# Altium PCB Motor_Driver_HIP4082_Board_V1.1.PcbDoc
Units mil, origin at the board's own origin, x right, y up, seen from the top; angles counter-clockwise.
Board outline 3070.87 x 1653.54 mil, 4 copper layers (TOP, GND02, POWER03, Bottom), stack 23.756 mil thick; 59 components, 43 nets, 180 pads, 243 vias.
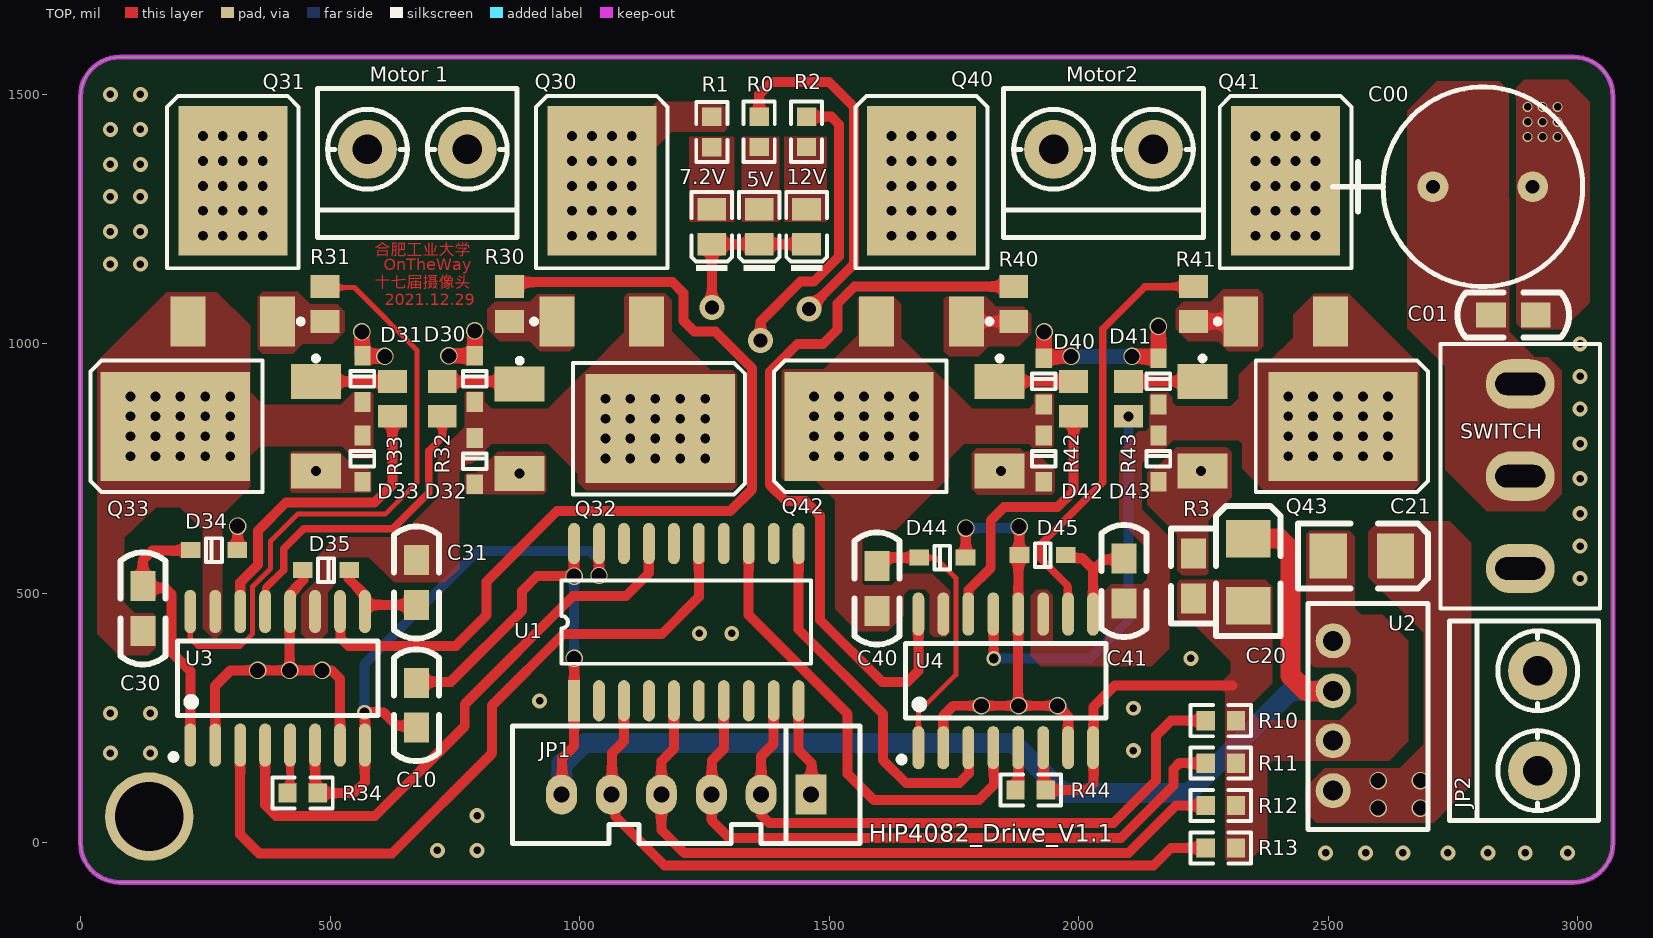
[diagram p0: TOP view]
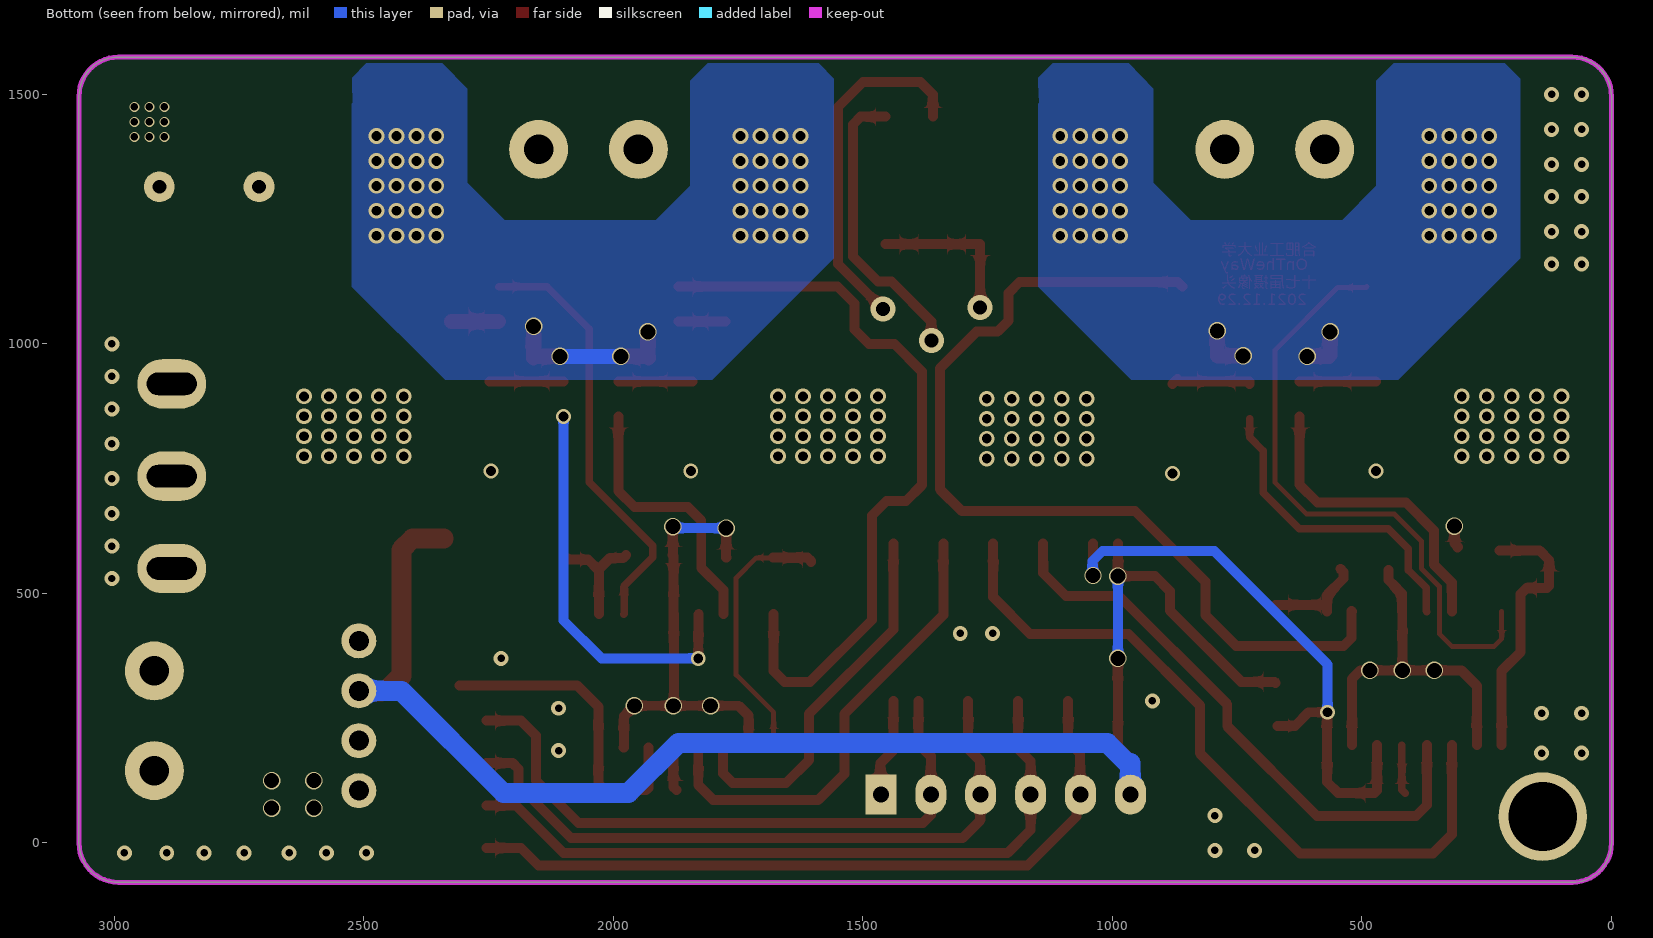
[diagram p1: Bottom view, seen from below]
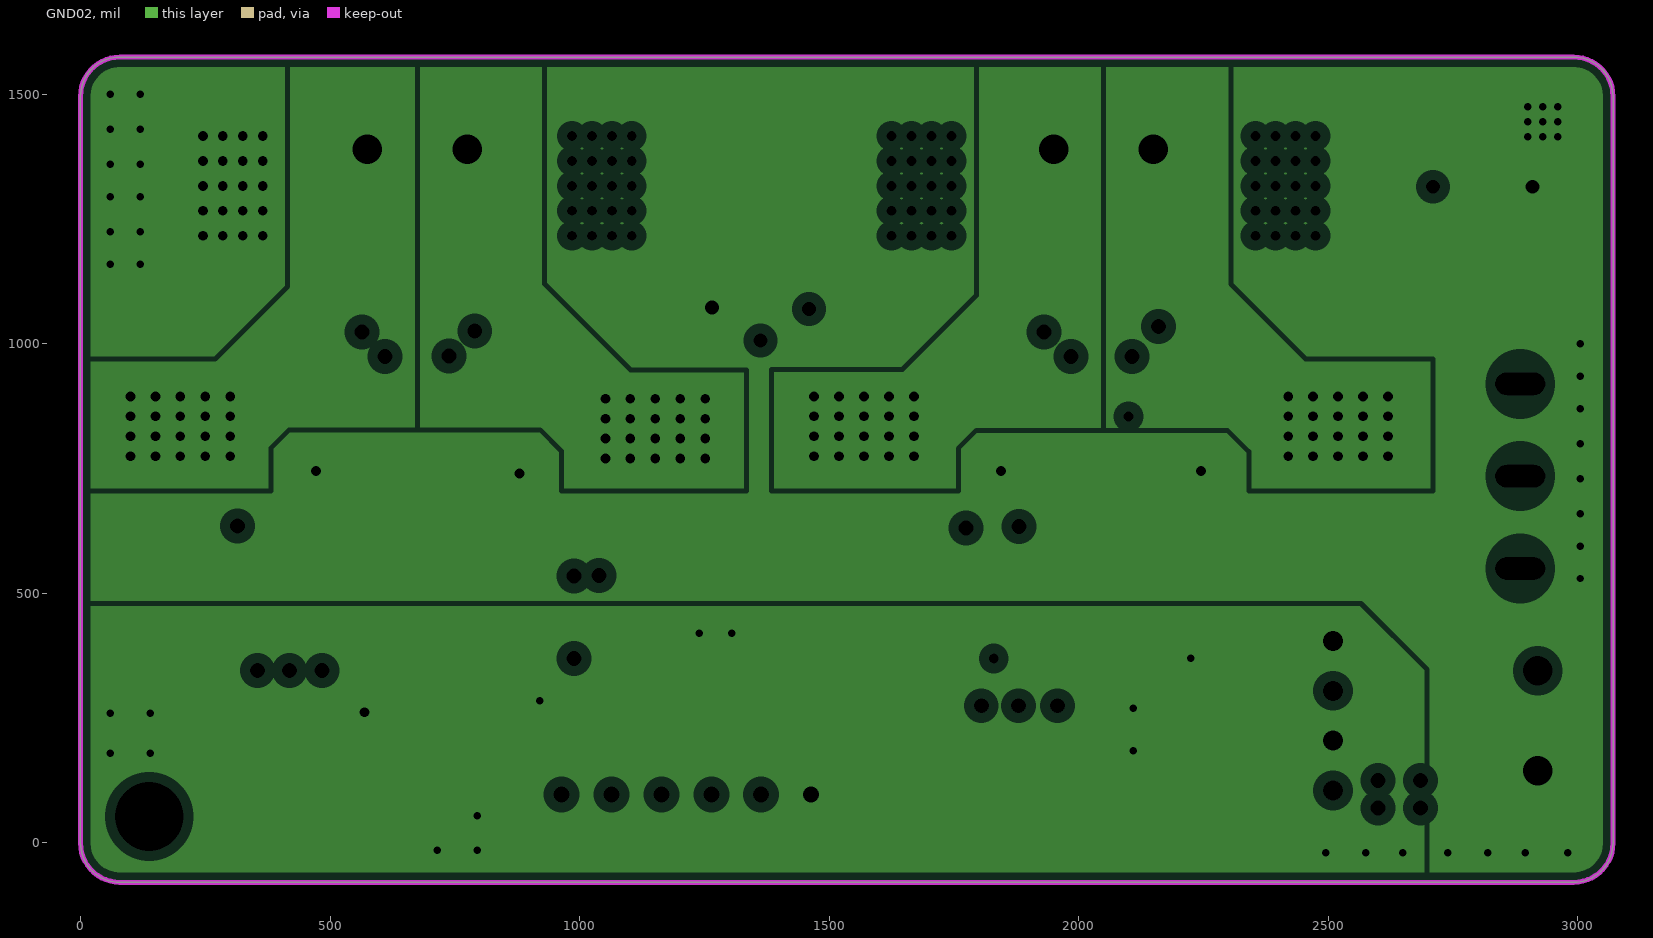
[diagram p2: GND02, clearances drawn from the general rule]
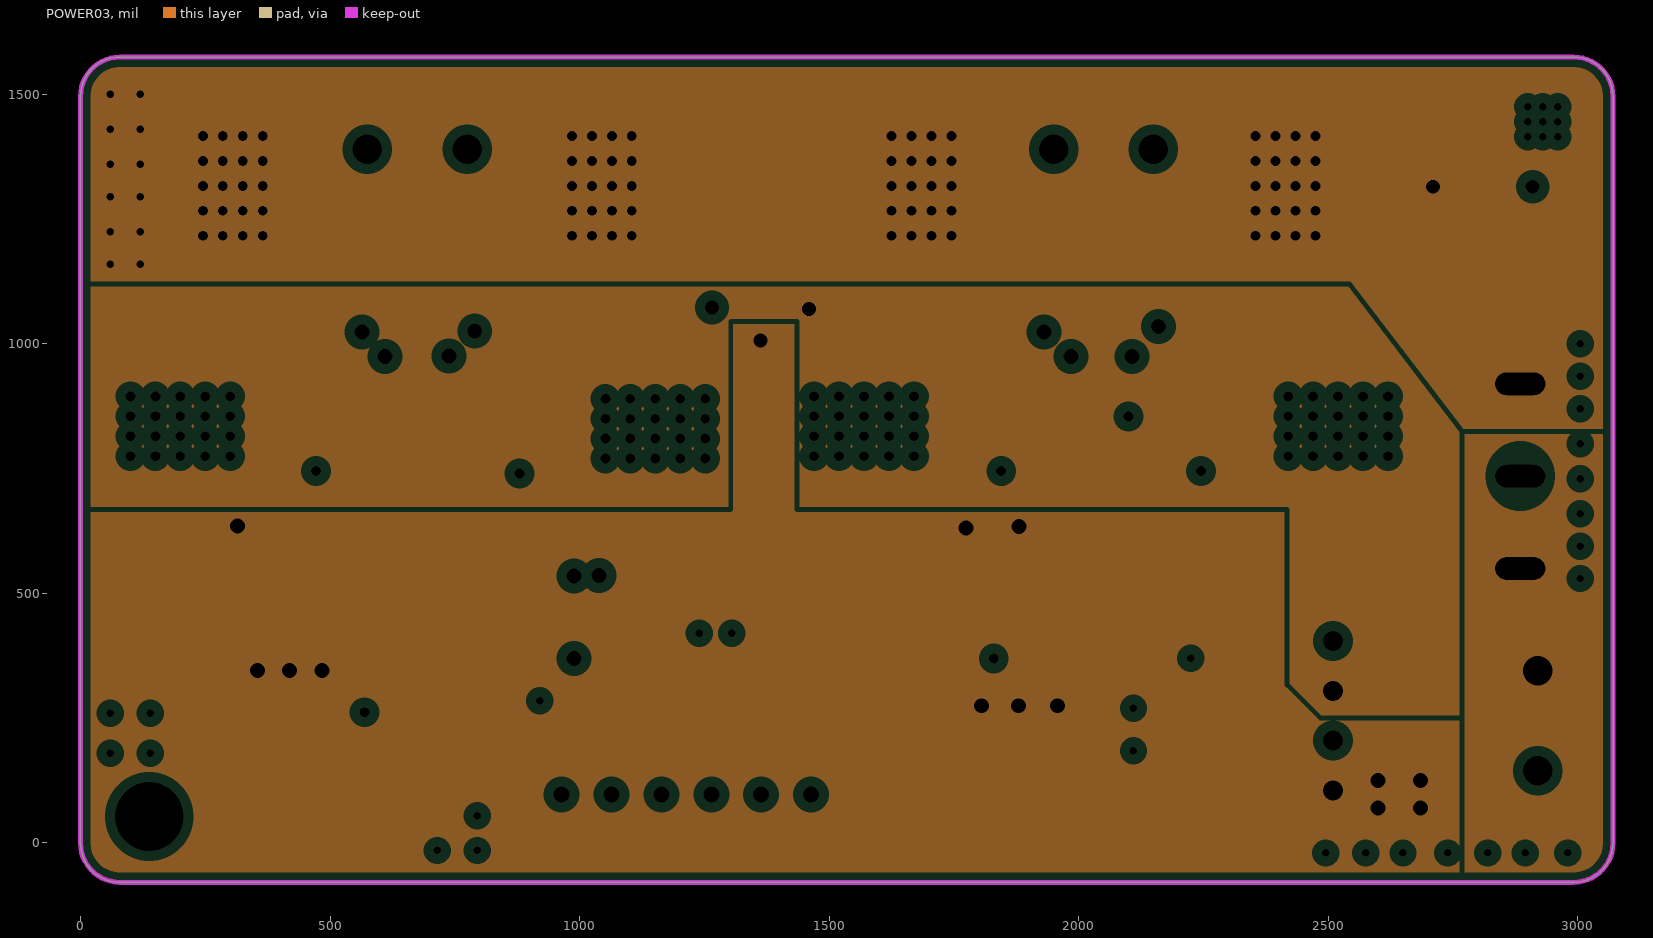
[diagram p3: POWER03, clearances drawn from the general rule]
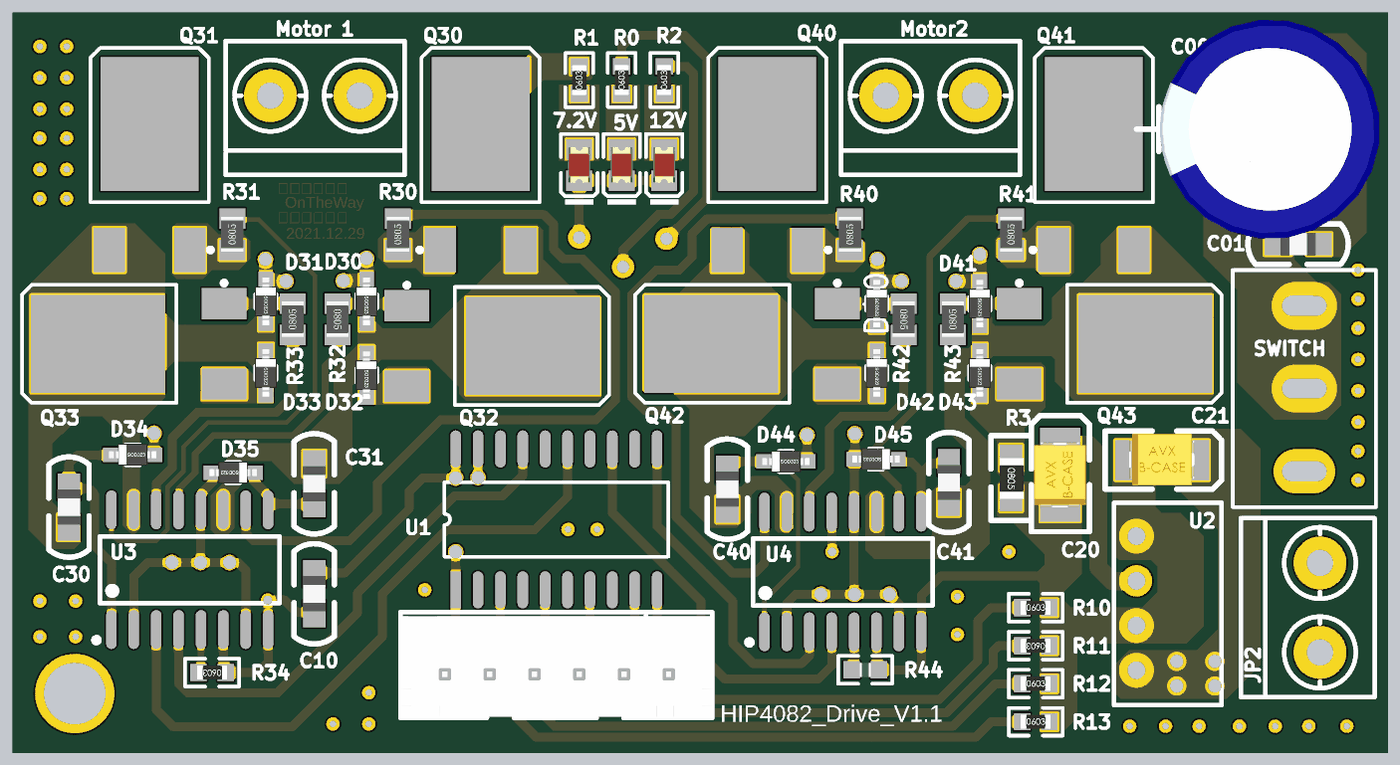
[diagram p4: 3D render of the assembled board from above, using the file's embedded part models]

## Layer stack, top to bottom
Top Solder: solder mask 0.4, Solder Resist, Dk 3.5
TOP: signal copper 1.4
Dielectric 2: prepreg 2.8, PP-006, Dk 4.1
GND02: plane copper 1.378, net (Multiple Nets)
Dielectric 1: dielectric 12.6, FR-4, Dk 4.8
POWER03: plane copper 1.378, net (Multiple Nets)
Dielectric 3: prepreg 2.8, PP-006, Dk 4.1
Bottom: signal copper 1.4
Bottom Solder: solder mask 0.4, Solder Resist, Dk 3.5

## Board outline
0,0 ccw(c78.74,0) 78.74,-78.74 78.52,-78.74 2992.13,-78.74 ccw(c2992.13,0) 3070.87,0 3070.87,1496.06 ccw(c2992.13,1496.06) 2992.13,1574.8 78.74,1574.8 ccw(c78.74,1496.06) 0,1496.06

## Design rules (kind name [scope] priority, off if disabled: settings)
Clearance [All] p1: gap=2 ignorepadtopadclearanceinfootprint=FALSE
HoleSize [All] p1 off: absolutevalues=TRUE maxlimit=100 minlimit=1 maxpercent=80.000 minpercent=20.000
HoleToHoleClearance [All] p1 off: gap=10 allowstackedmicrovias=TRUE
MinimumSolderMaskSliver [All] p1 off: minsoldermaskwidth=10
PlaneClearance [All] p1: clearance=20
PlaneConnect [All] p1: planeconnectstyle=Direct reliefexpansion=20 reliefentries=4 reliefconductorwidth=10 reliefairgap=10
PolygonConnect [All] p1: connectstyle=Direct reliefconductorwidth=10 reliefentries=4 polygonreliefangle="90 Angle" airgapwidth=10
RoutingVias [All] p1: holewidth=28 width=50 viastyle="Through Hole" minholewidth=28 minwidth=50 maxholewidth=28 maxwidth=50
SilkToSilkClearance [All] p1 off: silktosilkclearance=10
SilkToSolderMaskClearance [IsPad] p1 off: minsilkscreentomaskgap=10 clearancetoexposedcopper=TRUE
SolderMaskExpansion [All] p1: expansion=4
Width PGND [InNet('PGND')] p1: maxlimit=50 minlimit=10 preferedwidth=30
Width GND [InNet('GND')] p2: maxlimit=50 minlimit=10 preferedwidth=30
Width 12V [InNet('12V')] p3: maxlimit=50 minlimit=10 preferedwidth=30
Width "7.2V In" [InNet('7.2V In')] p4: maxlimit=50 minlimit=10 preferedwidth=30
Width 7.2V [InNet('7.2V')] p5: maxlimit=50 minlimit=10 preferedwidth=30
Width 5V [InNet('5V')] p6: maxlimit=50 minlimit=10 preferedwidth=30
Width [All] p7: maxlimit=30 minlimit=10 preferedwidth=20
23 further rules are at their usual default settings.

## Components (designator, comment, footprint, x,y, rotation, side; value= is the part's Value field where it differs from the comment)
5V "" 0805_LED_S1 1360,1235 r90 top
7.2V "" 0805_LED_S1 1265,1235 r90 top
12V "" 0805_LED_S1 1455,1235 r90 top
C00 "470uF/25V" RB.2/.4 2710,1315 r180 top
C01 "100nF" 0805C 2916,1058 r180 top
C10 "100nF" 0805C 673,321 r270 top
C20 "" 3528 2340,610 r90 top value=4.7uF
C21 "" 3528 2635,575 r0 top value=2.2uF
C30 "1uF" 0805C 125,515 r270 top
C31 "1uF" 0805C 673,477 r90 top
C40 "1uF" 0805C 1596,555 r270 top
C41 "1uF" 0805C 2091,570 r270 top
D30 "1N5819" SOD-323 790,930 r270 top
D31 "1N5819" SOD-323 565,930 r270 top
D32 "1N5819" SOD-323 790,765 r270 top
D33 "1N5819" SOD-323 565,770 r270 top
D34 "1N5819" SOD-323 267.54,587 r0 top
D35 "1N5819" SOD-323 492,547 r180 top
D40 "1N5819" SOD-323 1930,925 r270 top
D41 "1N5819" SOD-323 2160,925 r270 top
D42 "1N5819" SOD-323 1930,770 r270 top
D43 "1N5819" SOD-323 2160,770 r270 top
D44 "1N5819" SOD-323 1727,572 r0 top
D45 "1N5819" SOD-323 1928,577 r180 top
JP1 "HEADER 6" SIP6N 1464,97 r180 top
JP2 "HEADER 2" KF301-2P#1 2920,245 r180 top
Motor2 "HEADER 2" KF301-2P#1 2050,1390 r270 top
"Motor 1" "HEADER 2" KF301-2P#2 675,1390 r270 top
Q30 "IR7843" LR7843#1 1044.76,1186.73 r270 top
Q31 "IR7843" LR7843#2 305.24,1186.73 r270 top
Q32 "IR7843" LR7843#1 1021.73,830.24 r180 top
Q33 "IR7843" LR7843#2 330,835 r0 top
Q40 "IR7843" LR7843#2 1685.24,1186.73 r270 top
Q41 "IR7843" LR7843#1 2414.76,1186.73 r270 top
Q42 "IR7843" LR7843#2 1700,835 r0 top
Q43 "IR7843" LR7843#1 2390,835 r180 top
R0 "4.7K" 0603_R 1360,1425 r90 top
R1 "4.7K" 0603_R 1265,1424.69 r90 top
R2 "4.7K" 0603_R 1455,1425 r90 top
R3 "0" 0805R 2230,579.96 r270 top
R10 "10K" 0603_R 2285,245 r0 top
R11 "10K" 0603_R 2285,160 r180 top
R12 "10K" 0603_R 2285,75 r0 top
R13 "10K" 0603_R 2285,-10 r0 top
R30 "20" 0805 860,1080 r90 top
R31 "20" 0805 490,1080 r90 top
R32 "20" 0805 725,890 r270 top
R33 "20" 0805 625,890 r90 top
R34 "10K" 0603_R 445,100 r180 top
R40 "20" 0805 1870,1080 r90 top
R41 "20" 0805 2230,1080 r90 top
R42 "20" 0805 1990,890 r270 top
R43 "20" 0805 2100,890 r90 top
R44 "10K" 0603_R 1904,106 r180 top
SWITCH "Header 3" KEY-3P 2885,920.08 r90 top
U1 "74HC245" SOP20 989,285 r90 top
U2 "B0512S-1W" SIP4_B_S-1W 2460,27 r0 top
U3 "HIP4082" SOP-16_208mil 395,330 r0 top
U4 "HIP4082" SOP-16_208mil 1854,324.86 r0 top

## Footprints (in the part's own frame and the unit in brackets; to place one, negate y for a bottom-side part, rotate by r counter-clockwise, add the part's x,y. Pads: shape width x height; smd on the part's side, far side on the other; paste and mask are expansions set on the pad)
0603_R [mm]
  rect 0.93x0.98 smd: 1(-0.77,0) 2(0.77,0)
  silkscreen extent -1.53,-0.79 1.54,0.79, body extent -0.85,-0.4 0.85,0.4, height 0.56
0805 [mm]
  rect 1.16x1.47 smd: 1(-0.89,0) 2(0.89,0)
  body extent -1,-0.63 1,0.63, height 0.55
0805_LED_S1 [mm]
  rect 1.16x1.47 smd: A(0.89,0) K(-0.89,0)
  silkscreen extent -2.24,-1.04 1.77,1.03, body extent -1.01,-0.62 1.01,0.62, height 1.1
0805C [mil]
  rect 60x50 smd: 1(0,0) 2(90,0)
  silkscreen extent -67,-45 157,45, body extent 6,-26 84,26, height 29
0805R [mil]
  rect 60x50 smd: 1(0,0) 2(90,0)
  silkscreen extent -50,-45 140,45, body extent 1,-26 91,28, height 30
3528 [mil]
  rect 75x90 smd: 1(0,0) 2(-135,0)
  silkscreen extent -195,-65 65,65, body extent -141,-57 5,59, height 80
KEY-3P [mil]
  oval 99x138 hole 45 slot 100 at 90 deg: 1(-370.08,0) 2(-185.04,0) 3(0,0)
  silkscreen extent -450,-160 80,160
KF301-2P#1 [mm]
  round 3 hole 1.5: 1(0,2.54) 2(0,-2.54)
  silkscreen extent -3.1,-5.08 4.5,5.08
KF301-2P#2 [mm]
  round 3 hole 1.5: 1(0,-2.54) 2(0,2.54)
  silkscreen extent -3.1,-5.08 4.5,5.08
LR7843#1 [mm]
  rect 7.6x5.55 smd: 1(-3.556,0)
  rect 2.54x1.778 smd: 2(3.6,-2.28) 3(3.6,2.28)
  silkscreen extent -7.87,-3.58 3.72,3.35
LR7843#2 [mm]
  rect 7.6x5.55 smd: 1(-3.556,0)
  rect 2.54x1.778 smd: 2(3.6,2.28) 3(3.6,-2.28)
  silkscreen extent -7.87,-3.35 3.72,3.58
RB.2/.4 [mil]
  round 62 hole 28: 1(0,0) 2(-200,0)
  silkscreen extent -300,-200 200,200, body extent -345,-246 147,246, height 986
SIP4_B_S-1W [mil]
  round 70 hole 40: 1(50,378) 2(50,278) 3(50,178) 4(50,78)
  silkscreen extent 0,0 240,453
SIP6N [mil]
  rect 62x80 hole 32: 1(0,0)
  oval 62x80 hole 32: 2(100,0) 3(200,0) 4(300,0) 5(400,0) 6(500,0)
  silkscreen extent -98,-138 598,98, body extent -99,-129 597,95, height 277
SOD-323 [mm]
  rect 1x0.83 smd: 1(1.18,0) 2(-1.18,0)
  silkscreen extent -0.4,-0.6 0.4,0.6, body extent -1.35,-0.62 1.35,0.63, height 1.1
SOP20 [mm]
  rect 2.1x0.6 smd: 1(0,0)
  oval 2.1x0.6 smd: 2(0,-1.27) 3(0,-2.54) 4(0,-3.81) 5(0,-5.08) 6(0,-6.35) 7(0,-7.62) 8(0,-8.89) 9(0,-10.16) 10(0,-11.43) 11(8,-11.43) 12(8,-10.16) 13(8,-8.89) 14(8,-7.62) 15(8,-6.35) 16(8,-5.08) 17(8,-3.81) 18(8,-2.54) 19(8,-1.27) 20(8,0)
  silkscreen extent 1.89,-12.06 6.11,0.64
SOP-16_208mil [mm]
  oval 0.6x2.2 smd: 1(-4.445,-3.4) 2(-3.175,-3.4) 3(-1.905,-3.4) 4(-0.635,-3.4) 5(0.635,-3.4) 6(1.905,-3.4) 7(3.175,-3.4) 8(4.445,-3.4) 9(4.445,3.4) 10(3.175,3.4) 11(1.905,3.4) 12(0.635,3.4) 13(-0.635,3.4) 14(-1.905,3.4) 15(-3.175,3.4) 16(-4.445,3.4)
  silkscreen extent -5.45,-4.15 5.1,1.9

## Part data
5V 7.2V 12V: library part LED
C00: library part CAPACITOR, "Capacitor"
C01 C10 C30 C31 C40 C41: library part CAP, "Capacitor"
C20 C21: library part "Cap Pol3", "Polarized Capacitor (Surface Mount)", LatestRevisionDate=29-May-2009, LatestRevisionNote="IPC-7351 Footprint Added.", PackageDescription="Chip Capacitor", PackageReference=C0805, Published=8-Jun-2000, Publisher="Altium Limited"
D30 D31 D32 D33 D34 D35 D40 D41 D42 D43 D44 D45: library part "DIODE SCHOTTKY", "Schottky Diode"
Q30 Q31 Q32 Q33 Q40 Q41 Q42 Q43: library part MOSFET-N, "N-Channel MOSFET", LatestRevisionDate=17-Jul-2002, LatestRevisionNote="Re-released for DXP Platform.", PackageDescription="TO, Flat Index; 3 In-Line, Axial Leads; Body Dia. 4.6mm; Lead Dia. 0.5 mm (max)", PackageReference=E3, PackageVersion=1995/1996, Published=8-Jun-2000, Publisher="Altium Limited"
R0 R1 R2 R3 R10 R11 R12 R13 R30 R31 R32 R33 R34 R40 R41 R42 R43 R44: library part RES2
SWITCH: "Header, 3-Pin", LatestRevisionDate=17-Jul-2002, LatestRevisionNote="Re-released for DXP Platform.", Publisher="Altium Limited"
U2: library part "4 HEADER", "4 Pin Header"

## Free pads (board coordinates)
  round 177.17 hole 137.8: 2(138,53)

## Via types
v1: diameter 31.5, hole 19.68, TOP to Bottom, 160 vias
v2: diameter 30, hole 15, TOP to Bottom, 40 vias
v3: diameter 35, hole 30, TOP to Bottom, 24 vias
v4: diameter 20, hole 15, TOP to Bottom, 9 vias
v5: diameter 30, hole 20, TOP to Bottom, 7 vias
v6: diameter 50, hole 28, TOP to Bottom, 3 vias

## Nets (pads, with @x,y where several pads share a name; then routed paths per layer and width w, separated by ;. In a path a pad name is that pad's centre, name@x,y a point inside that pad or via, vN(x,y) a via of type N, cw(c..) or ccw(c..) an arc to the next point about the centre after c; other vN are vias at no path point)
5V: C10.1 C20.1 JP1.6 R0.2 U1.1 U1.20 U2.2 | length 3844.3
  TOP w20: C10.1 675,323 742,323 885,466 885,505 914.96,534.96 v3(989,534.96) U1.20 ; JP1.6@965,98 965,170 989,194 U1.1 v3(989,369.96) ; R0.2 1360,1500 1385,1525 1500,1525 1550,1475 1550,1160 v6(1460,1070)
  TOP w40: C20.1 2402.43,610 2425,587.43 2425,335 2455.93,304.07 2509.07,304.07 U2.2
  Bottom w20: v3(989,369.96) v3(989,534.96)
  Bottom w40: JP1.6 964,160 970,160 1010,200 1870,200 1970,100 2220,100 2425,305 U2.2
7.2V: C00.1 C01.2 D30.2 D31.2 D40.2 D41.2 Q30.1 Q31.1 Q40.1 Q41.1 R1.2 SWITCH.2 SWITCH.3 | length 545.2
  TOP w30: v3(564,1024) 564,977.46 D31.2 565,976.34 566.34,975 v3(610,975) ; v3(738,976) 789.53,976 D30.2 v3(790,1026) ; v3(1931,1024) D40.2@1931,974.66 ; v3(1985,975) 1931.34,975 D40.2@1931,974.66 ; v3(2107,975) 2158.66,975 D41.2@2160,973.66 ; D41.2 D41.2@2160,973.66 ; v3(2160,1035) D41.2@2160,973.66 ; D40.2@1931,974.66 1931,972.46 D40.2 1930,973.66 D40.2@1931,974.66
  Bottom w30: v3(1985,975) v3(2107,975)
  other v1: 245.24,1216.73 285.24,1216.73 325.24,1216.73 365.24,1216.73 984.76,1216.73 1024.76,1216.73 1064.76,1216.73 1104.76,1216.73 1625.24,1216.73 1665.24,1216.73 1705.24,1216.73 1745.24,1216.73 2354.76,1216.73 2394.76,1216.73 2434.76,1216.73 2474.76,1216.73 245.24,1266.73 285.24,1266.73 325.24,1266.73 365.24,1266.73 984.76,1266.73 1024.76,1266.73 1064.76,1266.73 1104.76,1266.73 1625.24,1266.73 1665.24,1266.73 1705.24,1266.73 1745.24,1266.73 2354.76,1266.73 2394.76,1266.73 2434.76,1266.73 2474.76,1266.73 245.24,1316.73 285.24,1316.73 325.24,1316.73 365.24,1316.73 984.76,1316.73 1024.76,1316.73 1064.76,1316.73 1104.76,1316.73 1625.24,1316.73 1665.24,1316.73 1705.24,1316.73 1745.24,1316.73 2354.76,1316.73 2394.76,1316.73 2434.76,1316.73 2474.76,1316.73 245.24,1366.73 285.24,1366.73 325.24,1366.73 365.24,1366.73 984.76,1366.73 1024.76,1366.73 1064.76,1366.73 1104.76,1366.73 1625.24,1366.73 1665.24,1366.73 1705.24,1366.73 1745.24,1366.73 2354.76,1366.73 2394.76,1366.73 2434.76,1366.73 2474.76,1366.73 245.24,1416.73 285.24,1416.73 325.24,1416.73 365.24,1416.73 984.76,1416.73 1024.76,1416.73 1064.76,1416.73 1104.76,1416.73 1625.24,1416.73 1665.24,1416.73 1705.24,1416.73 1745.24,1416.73 2354.76,1416.73 2394.76,1416.73 2434.76,1416.73 2474.76,1416.73
  other v2: 60,1160 120,1160 60,1225 120,1225 60,1295 120,1295 60,1360 120,1360 60,1430 120,1430 60,1500 120,1500
"7.2V In": JP2.2 SWITCH.1
12V: C21.1 D34.1 D35.1 D44.1 D45.1 R2.2 U2.4 U3.2 U3.7 U3.12 U4.2 U4.7 U4.12 | length 2325.6
  TOP w20: U3.2 270,315 301,346 v3(355,346) v3(419,346) ; D34.1@309,592 307.54,593.46 315,600.91 v3(315,634.96) ; D35.1@447,547 447,527 420,500 U3.12 419.31,463.17 419.31,429.11 419,428.8 v3(419,346) ; U3.7 520,329 503,346 v3(484,346) v3(419,346) ; v6(1363,1007) 1363,1045 1443,1125 1470,1125 1520,1175 1520,1440 1504.68,1455.32 R2.2 ; U4.2 1729,255 1749,275 v3(1805,275) v3(1880,275) ; D44.1 1774,572.54 v3(1774,631) ; U4.12 1879,276 v3(1880,275) ; U4.12@1879.09,423.89 1879.31,424.11 1879.31,574.76 D45.1@1881,576.46 ; D45.1@1881,575.54 D45.1@1881,576.46 ; v3(1881,634) D45.1@1881,576.46 ; D45.1 D45.1@1881,576.46 ; U4.7 U4.7@1979,192.14 ; U4.7@1980,191.14 U4.7@1979,192.14 ; v3(1880,275) v3(1958,275) 1979,254 U4.7@1979,192.14
  Bottom w20: v3(1774,631) 1873.94,631 1876.94,634 v3(1881,634)
  other v3: 2600,70 2685,70 2600,125 2685,125
AHO1: R30.2 U3.10 | length 1891.1
  TOP w20: U3.10 520.64,464.49 521,464.13 521,411 537,395 752,395 814,457 814,524 955,665 1302,665 1346,709 1346,951 1272,1025 1230,1025 1208,1047 1208,1102 1186,1124 868.96,1124 R30.2
AHO2: R41.2 U4.10 | length 865.1
  TOP w15: U4.10 1978.31,459.41 1978.31,515.69 1921,573 1921,596 2048,723 2048,1030 2133.04,1115.04 R41.2
AHS1: "Motor 1.2" C31.2 D30.1 D32.2 Q30.3 Q32.1 U3.11
  other v1: 1051.73,770.24 1101.73,770.24 1151.73,770.24 1201.73,770.24 1251.73,770.24 1051.73,810.24 1101.73,810.24 1151.73,810.24 1201.73,810.24 1251.73,810.24 1051.73,850.24 1101.73,850.24 1151.73,850.24 1201.73,850.24 1251.73,850.24 1051.73,890.24 1101.73,890.24 1151.73,890.24 1201.73,890.24 1251.73,890.24
AHS2: C41.2 D41.1 D43.2 Motor2.1 Q41.3 Q43.1 U4.11
  other v1: 2420,775 2470,775 2520,775 2570,775 2620,775 2420,815 2470,815 2520,815 2570,815 2620,815 2420,855 2470,855 2520,855 2570,855 2620,855 2420,895 2470,895 2520,895 2570,895 2620,895
ALO1: R32.2 U3.13 | length 638
  TOP w15: U3.13 371.65,465.51 371.65,511.65 407,547 407,590 447,630 626,630 697.5,701.5 697.5,785.5 725,813 R32.2@725,849.96
ALO2: R43.1 U4.13 | length 799.6
  TOP w20: U4.13 1829.69,458.02 1829.69,423.97 1830,423.66 v5(1830,370)
  Bottom w20: v5(1830,370) 2024,370 2100,446 v5(2100,854.96)
BHO1: R31.2 U3.16 | length 1241.4
  TOP w10: U3.16 220,409 235,394 320,394 345,419 345,514 381,550 381,605 435,659 611,659 674,722 674,988 549,1113 492.04,1113 R31.2
BHO2: R40.2 U4.16 | length 1522.4
  TOP w20: U4.16 1679,345 1657,323 1606,323 1482,447 1482,656 1453,685 1414,685 1382,717 1382,945 1437,1000 1488,1000 1517,1029 1517,1081 1551.04,1115.04 R40.2
BHS1: "Motor 1.1" C30.2 D31.1 D33.2 Q31.3 Q33.1 U3.15
  other v1: 100,775 150,775 200,775 250,775 300,775 100,815 150,815 200,815 250,815 300,815 100,855 150,855 200,855 250,855 300,855 100,895 150,895 200,895 250,895 300,895
BHS2: C40.2 D40.1 D42.2 Motor2.2 Q40.3 Q42.1 U4.15
  other v1: 1470,775 1520,775 1570,775 1620,775 1670,775 1470,815 1520,815 1570,815 1620,815 1670,815 1470,855 1520,855 1570,855 1620,855 1670,855 1470,895 1520,895 1570,895 1620,895 1670,895
BLO1: R33.1 U3.14 | length 621.1
  TOP w20: U3.14 320,522 356,558 356,626 412,682 589,682 625,718 R33.1
BLO2: R42.2 U4.14 | length 546.3
  TOP w20: U4.14 1779.69,459.41 1779.69,506.69 1824,551 1824,646 1851,673 1958,673 1990,705 R42.2
GND: C10.2 C20.2 C21.2 JP1.1 R3.2 R10.2 R11.1 R12.2 R13.2 R34.1 R44.1 U1.10 U1.19 U2.1 U2.3 U3.6 U3.8 U4.6 U4.8 | length 2054.2
  TOP w20: U3.6 470,105.31 R34.1 547.7,100 570,122.3 U3.8 570,262 607,262 634.29,234.71 C10.2@669.29,234.71 ; U1.19 v3(1039,536) v3@1040,535 ; U1.10 1439,186 1465,160 1465,98 JP1.1 ; U4.6@1930,191.14 1930,110.31 R44.1 2017,106 2030,119 2030,273 2073,316 2308,316
  Bottom w20: v5(569,262) 569,358 796,585 1020,585 1040,565 v3@1040,535
  other v2: 2495,-20 2575,-20 2650,-20 715,-15 795,-15 795,55 60,180 140,180 2110,185 60,260 140,260 2110,270 920,285 2225,370 1240,420 1305,420
"Motor In1": U1.17 U3.4 | length 1184.7
  TOP w20: U3.4 370,76 392,54 590,54 770,234 770,278 987,495 1093,495 1139,541 U1.17
"Motor In2": U1.15 U3.3 | length 1490
  TOP w20: U3.3 320,17 358,-21 624,-21 825,180 825,276 968,419 1165,419 1239,493 U1.15
"Motor In3": U1.13 U4.4 | length 945.7
  TOP w20: U1.13 1339,457 1537,259 1537,138.72 1589.72,86 1800,86 1830,116 U4.4@1830,191.14
"Motor In4": U1.11 U4.3 | length 755
  TOP w20: U1.11 1439,428 1608,259 1608,166 1654,120 1761,120 1780,139 U4.3@1780,191.14
Net5V_A: 5V.A R0.1
Net7.2V_A: 7.2V.A R1.1
Net12V_A: 12V.A R2.1
NetC30_1: C30.1 D34.2 U3.1 | length 541.6
  TOP w20: U3.1 220,345 182,383 182,499 170,511 129,511 C30.1 125,567 144,586 D34.2@224.54,586
NetC31_1: C31.1 D35.2 U3.9 | length 205.7
  TOP w20: D35.2@543.46,549.54 537,543.09 537,530 570,497 U3.9@570,475.33 ; U3.9 U3.9@570,475.33 ; C31.1 571.67,477 U3.9@570,475.33
NetC40_1: C40.1 D44.2 U4.1 | length 542.2
  TOP w10: U4.1 1679,262 1754,337 1754,531 1713.46,571.54 1681,571.54 D44.2
  TOP w20: C40.1@1604.5,563.5 1604.5,565.5 1611,572 D44.2
NetC41_1: C41.1 D45.2 U4.9 | length 225.4
  TOP w20: D45.2 1980.8,570.66 2007.34,570.66 2030.5,547.5 2051,568 2089,568 C41.1 ; U4.9 2029,546
NetQ30_2: Q30.2 R30.1
NetQ31_2: Q31.2 R31.1
NetQ32_2: Q32.2 R32.1 | length 168.3
  TOP w20: R32.1@725,920.04 R32.1@730,925.04 ; R32.1 R32.1@730,925.04 ; Q32.2 870,930 865.04,925.04 R32.1@730,925.04
NetQ33_2: Q33.2 R33.2 | length 153.4
  TOP w20: Q33.2 624.72,924.76 R33.2
NetQ40_2: Q40.2 R40.1 | length 95
  TOP w20: Q40.2 R40.1 R40.1
NetQ41_2: Q41.2 R41.1 | length 95
  TOP w20: Q41.2 Q41.2
  TOP w30: R41.1 Q41.2
NetQ42_2: Q42.2 R42.1 | length 148.4
  TOP w20: Q42.2 1989.72,924.76 R42.1
NetQ43_2: Q43.2 R43.2 | length 148.4
  TOP w20: R43.2 2247.99,925.04 Q43.2
NetR34_2: R34.2 U3.5 | length 99
  TOP w15: R34.2@413,100 420,107 U3.5
NetR44_2: R44.2 U4.5 | length 87.8
  TOP w20: R44.2 1880,112.32 U4.5@1880,191.14
PGND: 5V.K 7.2V.K 12V.K C00.2 C01.1 D32.1 D33.1 D42.1 D43.1 JP2.1 Q32.3 Q33.3 Q42.3 Q43.3 R3.1 | length 325
  TOP w20: v6@1265,1065 7.2V.K 5V.K 12V.K
  other v2: 2740,-20 2820,-20 2895,-20 2980,-20 3005,530 3005,595 3005,660 3005,730 3005,800 3005,870 3005,935 3005,1000
  other v4: 2900,1415 2930,1415 2960,1415 2900,1445 2930,1445 2960,1445 2900,1475 2930,1475 2960,1475
  other v5: 880,740.47 471.73,745.24 1845,745 2245,745
  other v6: 1265,1073
PWM1: JP1.5 R13.1 U1.3 | length 1483
  TOP w20: JP1.5 1072.04,88.96 1072.04,52.96 1170,-45 2150,-45 2185,-10 R13.1 ; JP1.5@1065,97 1065,180 1089,204 U1.3
PWM2: JP1.4 R12.1 U1.5 | length 1418.4
  TOP w20: U1.5 1189,189 1164,164 JP1.4 1164,26 1210,-20 2100,-20 2195,75 R12.1
PWM3: JP1.3 R11.2 U1.7 | length 1333.8
  TOP w20: JP1.3@1265,96 1265,45 1300,10 2085,10 2190,115 2190,148.28 2201.72,160 R11.2 ; JP1.3@1265,98 1265,165 1289,189 U1.7
PWM4: JP1.2 R10.1 U1.9 | length 1274.3
  TOP w20: U1.9 1389,199 1364,174 JP1.2 1364,56 1380,40 2070,40 2155,125 2155,215 2185,245 R10.1
pads on no net: U1.2 U1.4 U1.6 U1.8 U1.12 U1.14 U1.16 U1.18

## Polygon pours and split planes (outlines as drawn)
NetQ41_2 on TOP "NETQ41_2_L01_P138" (solid, remove dead copper, pour order 138): 2370,994.96 2360,984.96 2300,984.96 2280,1004.96 2220,1004.96 2195,1029.96 2195,1069.96 2210,1084.96 2265,1084.96 2290,1109.96 2360,1109.96 2370,1099.96
NetQ40_2 on TOP "NETQ40_2_L01_P136" (solid, remove dead copper, pour order 136): 1730,985 1740,975 1800,975 1820,995 1880,995 1905,1020 1905,1060 1890,1075 1835,1075 1815,1095 1735,1095 1730,1090
NetQ30_2 on TOP "NETQ30_2_L01_P134" (solid, remove dead copper, pour order 134): 990,994.96 980,984.96 920,984.96 900,1004.96 840,1004.96 815,1029.96 815,1069.96 830,1084.96 899.96,1084.96 914.96,1099.96 990,1099.96
NetQ31_2 on TOP "NETQ31_2_L01_P132" (solid, remove dead copper, pour order 132): 355,990 365,980 425,980 445,1000 505,1000 530,1025 530,1065 515,1080 460,1080 435,1105 365,1105 355,1095
7.2V on TOP "7.2V_L01_P130" (solid, remove dead copper, pour order 130): 1150,1390 1185,1425 1290,1425 1295,1430 1295,1475 1290,1475 1280,1485 1155,1485 1130,1460 1130,1400 1140,1390
PGND on TOP "PGND_L01_P128" (solid, remove dead copper, pour order 128): 1796,791 1786,781 1786,710 1796,700 1796,698 1946,698 1952,704 1952,746 1914,784 1890,784 1883,791
7.2V on TOP "7.2V_L01_P120" (solid, remove dead copper, pour order 120): 2863,1081 2863,1024 2914,973 2941,973 2968,946 2968,699 2934,665 2818,665 2735,748 2735,955 2659,1031 2659,1467 2718,1526 2843,1526 2862,1507
PGND on TOP "PGND_L01_P118" (solid, remove dead copper, pour order 118): 2889,1029 2970,1029 3024,1083 3024,1485 2980,1529 2893,1529 2877,1513 2877,1041
AHS2 on TOP "AHS2_L01_P116" (solid, remove dead copper, pour order 116): 2053,489 2053,408 2041,396 1955,396 1948,403 1948,496 1937,507 1916,507 1904,495 1904,374 1924,354 2147,354 2182,389 2182,489 2056,489 2052.92,492.08
AHS2 on TOP "AHS2_L01_P114" (solid, remove dead copper, pour order 114): 2430,1059 2472,1101 2541,1101 2683,959 2683,719 2667,703 2375,703 2328,750 2328,800 2321,807 2190,807 2158,775 2139,775 2139,773 2127,761 2127,669 2183,613 2183,455 2168,440 2066,440 2053,453 2053,506 2065,518 2127,518 2139,530 2138,531 2138,597 2131,597 2081,647 2081,785 2121,825 2135,825 2142,832 2142,898 2146,902 2179,902 2188,893 2188,882.85 2195.85,875 2305,875 2321,891 2321,938 2348,965 2382.32,965 2430,1012.68
no net on TOP "NONET_L01_P112" (solid, remove dead copper, pour order 112): 2465,1094
PGND on TOP "PGND_L01_P110" (solid, remove dead copper, pour order 110): 2260,646 2307,693 2307,783 2297,793 2197,793 2152,748 2144,748 2138,742 2138,678 2198,618 2198,547 2208,537 2255,537 2260,542
BHS2 on TOP "BHS2_L01_P108" (solid, remove dead copper, pour order 108): 1481.88,941.88 1557,1017 1557,1092 1561,1096 1629,1096 1645,1080 1645,1012 1726,931 1633,931
BHS2 on TOP "BHS2_L01_P106" (solid, remove dead copper, pour order 106): 1566,608 1585,627 1585,628 1635,628 1741,734 1741,770 1771,800 1900,800 1908,792 1946,792 1950,796 1950,898 1947,901 1915,901 1910,896 1910,880 1900,870 1787,870 1760,897 1708,949 1409,949 1405,945 1405,732 1411,726 1473,726 1512,687 1512,468 1556,424 1583.59,424 1566,502.36
no net on TOP "NONET_L01_P102" (solid, remove dead copper, pour order 102): 1650,497
BHS2 on TOP "BHS2_L01_P098" (solid, remove dead copper, pour order 98): 1571,516 1554,533 1554,447 1577,424 1618,424 1650,456 1650,497 1661,508 1692,508 1702,498 1702,420 1709,413 1734,413 1743,422 1743,504 1731,516 1707,540 1650,540 1626,516
GND on TOP "GND_L01_P096" (solid, remove dead copper, pour order 96): 2205.5,443 2198.06,450.44 2197.42,520.42 2204,527 2374,527 2388,513 2388,320 2339,271 2314,246.32 2294,266.32 2294,300 2288,306 2288,324 2305,341 2305,364 2226,443
12V on TOP "12V_L01_P094" (solid, remove dead copper, pour order 94): 2493.2,150.2 2644,150 2692,198 2692,421 2580,533 2580,624 2601,645 2744,645 2787,602 2787,116 2712,41 2476,41 2454,63 2454,111
GND on TOP "GND_L01_P092" (solid, remove dead copper, pour order 92): 2553,615 2542,626 2463,626 2456,619 2456,368 2472,352 2542,352 2557,337 2557,280 2479,202 2479,184 2539,165 2622,165 2661,204 2661,406 2660,406 2609,457 2566,457 2553,470
GND on TOP "GND_L01_P090" (solid, remove dead copper, pour order 90): 2298,-37 2341,-37 2378,0 2378,154 2389,165 2539,165 2556,182 2556,223 2533,246 2364,246 2339,271 2298,271 2294,267 2294,-32
AHS1 on TOP "AHS1_L01_P088" (solid, remove dead copper, pour order 88): 1013,947 1014,947 1090,1023 1090,1095 1097,1102 1171,1102 1185,1088 1185,1025 1280,930 1266,916 983,916
AHS1 on TOP "AHS1_L01_P084" (solid, remove dead copper, pour order 84): 770,901 774,905 806,905 809,902 809,885 824,870 936,870 1013,947 1307,947 1315,939 1315,716 1306,707 1012,707 996,723 996,740 936,800 824,800 784,760 774,760 770,765
BHS1 on TOP "BHS1_L01_P082" (solid, remove dead copper, pour order 82): 502.54,816.46 549,770 581,770 587,776 587,816.46
PGND on TOP "PGND_L01_P080" (solid, remove dead copper, pour order 80): 774,699 927,699 933,705 933,776 925,784 836,784 793,741 774,741 770,737 770,703
PGND on TOP "PGND_L01_P078" (solid, remove dead copper, pour order 78): 524,779 550,753 574,753 583,744 583,704 581,702 424,702 419,707 419,780 424,785 518,785
BHS1 on TOP "BHS1_L01_P076" (solid, remove dead copper, pour order 76): 347,896 348,896 366,878 522,878 547,903 583,903 587,899 587,795 360,795 335,770 335,909 351,893
BHS1 on TOP "BHS1_L01_P072" (solid, remove dead copper, pour order 72): 198.65,673 246,625.65 245,620 245,430 264,411 273,411 284,422 284,658 340,714 340,1035 341,1036 273,1104 173,1104 34,965 34,419 77,376 136,376 150.86,390.86 150.86,455.14 146,460 109,460 88,481 88,612 152.3,673
AHS1 on TOP "AHS1_L01_P070" (solid, remove dead copper, pour order 70): 505,563 506,562 506,513 495,502 495,422 482,409 452,409 441,420 442,421 442,496 477,531 477,578 512,613 637,613 716,692 716,780 773,837 806,837 806,787 803,787 759,743 759,550 731,522 628,522 628,523 578,573 515,573
GND on TOP "Top Layer-No Net" (solid, remove dead copper, pour order 68): 2460,620 2545,620 2545,360 2460,360
Net12V_A on TOP "Top Layer-No Net" (solid, remove dead copper, pour order 48): 1410,1415 1495,1415 1495,1245 1410,1245
no net on TOP "Top Layer-No Net" (solid, remove dead copper, pour order 46): 1325,1415
Net7.2V_A on TOP "Top Layer-No Net" (solid, remove dead copper, pour order 44): 1220,1415 1310,1415 1310,1245 1220,1245
Net5V_A on TOP "Top Layer-No Net" (solid, remove dead copper, pour order 42): 1400,1415 1400,1245 1325,1245 1325,1415
Net7.2V_A on TOP "Top Layer-No Net" (solid, remove dead copper, pour order 40): 1235,1415 1295,1415 1295,1245 1235,1245
no net on TOP "Top Layer-No Net" (solid, remove dead copper, pour order 30): 1125,1315
no net on TOP "Top Layer-No Net" (solid, remove dead copper, pour order 20): 1400,965
7.2V on Bottom "7.2V_L04_P126" (solid, remove dead copper, pour order 126): 967.79,1562 918,1511 918,1323 843,1248 540,1248 471,1317 471,1527 436,1562 214,1562 183,1531 183,1172 427,928 962,928 1149,1115 1149,1481 1147,1483 1148.3,1522.5 1148.3,1533.7 1120,1562
7.2V on Bottom "7.2V_L04_P122" (solid, remove dead copper, pour order 122): 2342.79,1562 2293,1511 2293,1323 2218,1248 1915,1248 1846,1317 1846,1527 1811,1562 1589,1562 1558,1531 1558,1172 1802,928 2337,928 2524,1115 2524,1481 2522,1483 2523.3,1522.5 2523.3,1533.7 2495,1562
GND on GND02 (split plane): 2692.9,345.89 2692.9,-58.64 78.52,-58.64 78.02,-58.69 72.16,-58.36 65.67,-57.26 59.34,-55.44 53.26,-52.92 47.49,-49.73 42.12,-45.92 37.21,-41.53 32.82,-36.62 29.01,-31.25 25.82,-25.48 23.3,-19.4 21.48,-13.07 20.38,-6.58 20.04,-0.58 20.1,0 20.1,474.9 2563.89,474.9
7.2V on GND02 (split plane): 78.74,1554.71 409.9,1554.71 409.9,1117.11 267.89,975.1 20.1,975.1 20.1,1496.06 20.04,1496.64 20.38,1502.64 21.48,1509.13 23.3,1515.46 25.82,1521.55 29.01,1527.31 32.82,1532.68 37.21,1537.59 42.12,1541.98 47.49,1545.79 53.26,1548.98 59.34,1551.5 65.67,1553.32 72.16,1554.43 78.16,1554.76
BHS1 on GND02 (split plane): 669.9,833.1 418,833.1 416.05,832.71 414.4,831.6 378.4,795.6 377.29,793.95 376.9,792 376.9,710.1 20.1,710.1 20.1,964.9 270,964.9 271.95,965.29 273.6,966.4 418.6,1111.4 419.71,1113.05 420.1,1115 420.1,1554.71 669.9,1554.71
AHS1 on GND02 (split plane): 924.9,1120 925.29,1118.05 926.4,1116.4 1098.4,944.4 1100.05,943.29 1102,942.9 1329.9,942.9 1329.9,710.1 969.1,710.1 969.1,785 968.71,786.95 967.6,788.6 924.6,831.6 922.95,832.71 921,833.1 680.1,833.1 680.1,1554.71 924.9,1554.71
PGND on GND02 (split plane): 2998.7,1554.43 3005.2,1553.32 3011.52,1551.5 3017.61,1548.98 3023.37,1545.79 3028.75,1541.98 3033.66,1537.59 3038.05,1532.68 3041.86,1527.31 3045.04,1521.55 3047.56,1515.46 3049.39,1509.13 3050.49,1502.64 3050.83,1496.64 3050.77,1496.06 3050.77,0 3050.83,-0.58 3050.49,-6.58 3049.39,-13.07 3047.56,-19.4 3045.04,-25.48 3041.86,-31.25 3038.04,-36.62 3033.66,-41.53 3028.75,-45.92 3023.37,-49.73 3017.61,-52.92 3011.52,-55.44 3005.2,-57.26 2998.7,-58.36 2992.7,-58.7 2992.13,-58.64 2703.1,-58.64 2703.1,348 2702.71,349.95 2701.6,351.6 2569.6,483.6 2567.95,484.71 2566,485.1 20.1,485.1 20.1,699.9 382,699.9 383.95,700.29 385.6,701.4 386.71,703.05 387.1,705 386.9,706 387.1,707 387.1,789.89 420.11,822.9 918.89,822.9 958.9,782.89 958.9,706 959,705.5 958.9,705 959.29,703.05 960.4,701.4 962.05,700.29 964,699.9 1335,699.9 1336.95,700.29 1338.6,701.4 1339.71,703.05 1340.1,705 1340.1,948 1339.71,949.95 1338.6,951.6 1336.95,952.71 1335,953.1 1104.11,953.1 935.1,1122.11 935.1,1554.71 1789.9,1554.71 1789.9,1099.11 1644.89,954.1 1385,954.1 1383.05,953.71 1381.4,952.6 1380.29,950.95 1379.9,949 1379.9,705 1380.29,703.05 1381.4,701.4 1383.05,700.29 1385,699.9 1759,699.9 1760.95,700.29 1762.6,701.4 1763.71,703.05 1764.1,705 1764,705.5 1764.1,706 1764.1,788.89 1797.11,821.9 2295.89,821.9 2335.9,781.89 2335.9,705 2336.29,703.05 2337.4,701.4 2339.05,700.29 2341,699.9 2710,699.9 2711.95,700.29 2713.6,701.4 2714.71,703.05 2715.1,705 2715.1,970 2714.71,971.95 2713.6,973.6 2711.95,974.71 2710,975.1 2457.11,975.1 2310.1,1122.11 2310.1,1554.71 2992.13,1554.71 2992.7,1554.76
BHS2 on GND02 (split plane): 2044.9,832.1 1795,832.1 1793.05,831.71 1791.4,830.6 1755.4,794.6 1754.29,792.95 1753.9,791 1753.9,710.1 1390.1,710.1 1390.1,943.9 1647,943.9 1648.95,944.29 1650.6,945.4 1798.6,1093.4 1799.71,1095.05 1800.1,1097 1800.1,1554.71 2044.9,1554.71
AHS2 on GND02 (split plane): 2299.9,1120 2300.29,1118.05 2301.4,1116.4 2451.4,966.4 2453.05,965.29 2455,964.9 2704.9,964.9 2704.9,710.1 2346.1,710.1 2346.1,784 2345.71,785.95 2344.6,787.6 2301.6,830.6 2299.95,831.71 2298,832.1 2055.1,832.1 2055.1,1554.71 2299.9,1554.71
5V on POWER03 (split plane): 2762.78,823.28 2762.78,255.1 2487.11,255.1 2423.1,319.11 2423.1,668 2422.71,669.95 2421.6,671.6 2419.95,672.71 2418,673.1 1441.1,673.1 1441.1,1045 1440.71,1046.95 1439.6,1048.6 1437.95,1049.71 1436,1050.1 1303,1050.1 1301.05,1049.71 1299.4,1048.6 1298.29,1046.95 1297.9,1045 1297.9,673.1 20.1,673.1 20.1,1114.9 2540.36,1114.9
"7.2V In" on POWER03 (split plane): 3050.77,0 3050.83,-0.58 3050.49,-6.58 3049.39,-13.07 3047.56,-19.4 3045.04,-25.48 3041.86,-31.25 3038.04,-36.62 3033.66,-41.53 3028.75,-45.92 3023.37,-49.73 3017.61,-52.92 3011.52,-55.44 3005.2,-57.26 2998.7,-58.36 2992.7,-58.7 2992.13,-58.64 2772.98,-58.64 2772.98,249.4 2773.1,250 2773.1,327 2772.98,327.6 2772.98,819.9 3050.77,819.9
7.2V on POWER03 (split plane): 78.74,1554.71 2992.13,1554.71 2992.7,1554.76 2998.7,1554.43 3005.2,1553.32 3011.52,1551.5 3017.61,1548.98 3023.37,1545.79 3028.75,1541.98 3033.66,1537.59 3038.05,1532.68 3041.86,1527.31 3045.04,1521.55 3047.56,1515.46 3049.39,1509.13 3050.49,1502.64 3050.83,1496.64 3050.77,1496.06 3050.77,830.1 2770.4,830.1 2546.93,1123.09 2546.68,1123.32 2546.49,1123.6 2545.94,1123.97 2545.44,1124.41 2545.12,1124.52 2544.83,1124.71 2544.19,1124.84 2543.56,1125.05 2543.22,1125.03 2542.88,1125.1 20.1,1125.1 20.1,1496.06 20.04,1496.64 20.38,1502.64 21.48,1509.13 23.3,1515.46 25.82,1521.55 29.01,1527.31 32.82,1532.68 37.21,1537.59 42.12,1541.98 47.49,1545.79 53.26,1548.98 59.34,1551.5 65.67,1553.32 72.16,1554.43 78.16,1554.76
12V on POWER03 (split plane): 1430.9,668 1431.29,666.05 1432.4,664.4 1434.05,663.29 1436,662.9 2412.9,662.9 2412.9,317 2413.29,315.05 2414.4,313.4 2481.4,246.4 2483.05,245.29 2485,244.9 2762.78,244.9 2762.78,-58.64 78.52,-58.64 78.02,-58.69 72.16,-58.36 65.67,-57.26 59.34,-55.44 53.26,-52.92 47.49,-49.73 42.12,-45.92 37.21,-41.53 32.82,-36.62 29.01,-31.25 25.82,-25.48 23.3,-19.4 21.48,-13.07 20.38,-6.58 20.04,-0.58 20.1,0 20.1,662.9 1303,662.9 1304.95,663.29 1306.6,664.4 1307.71,666.05 1308.1,668 1308,668.5 1308.1,669 1308.1,1039.9 1430.9,1039.9

## Keep-outs
Keep-Out Layer:
  lines w10: 78.52,-78.74 2992.13,-78.74 ccw(c2992.13,0) 3070.87,0 3070.87,1496.06 ccw(c2992.13,1496.06) 2992.13,1574.8 78.74,1574.8 ccw(c78.74,1496.06) 0,1496.06 0,0 ccw(c78.74,0) 78.74,-78.74

## Other copper
TOP:
  text "合肥工业大学" at 590,1170 h40
  text "OnTheWay" at 607.2,1139.37 h40
  text "十七届摄像头" at 590,1105 h40
  text "2021.12.29" at 610,1070 h40
GND02 (plane layer: these items are gaps in the copper):
  lines w10: 2,480 2566,480 2698,348 2698,-77 ; 10,970 10,705 382,705 ; 20,970 270,970 415,1115 415,1574.8 675,1574.8 ; 382,707 382,792 418,828 674,828 921,828 964,785 964,706 ; 675,828 675,1574.8 ; 930,1574.8 675,1574.8 ; 930,1575 930,1120 1102,948 1335,948 1335,705 964,705 ; 1759,705 1385,705 1385,949 1647,949 1795,1097 1795,1574.8 2050,1574.8 ; 1759,706 1759,791 1795,827 2051,827 2298,827 2341,784 2341,705 2710,705 2710,970 2455,970 2305,1120 2305,1575 ; 2050,827 2050,1574.8 ; 2305,1574.8 2050,1574.8
POWER03 (plane layer: these items are gaps in the copper):
  lines w10: -3,668 1303,668 ; 0,1120 2542.88,1120 2767.88,825 ; 1303,669 1303,1045 1436,1045 1436,668 2418,668 2418,317 2485,250 2565,250 2768,250 2768,327 ; 2767.88,-80 2767.88,825 ; 3070,825 2767.88,825 ; 3070,840 3070,1050

## Silkscreen, mask and mechanical layers (free items; w line width, h text height)
Top Overlay:
  text "HIP4082_Drive_V1.1" at 1580,-10 h60
Mechanical 1:
  lines w10: 78.52,-78.74 2992.13,-78.74 ccw(c2992.13,0) 3070.87,0 3070.87,1496.06 ccw(c2992.13,1496.06) 2992.13,1574.8 78.74,1574.8 ccw(c78.74,1496.06) 0,1496.06 0,0 ccw(c78.74,0) 78.74,-78.74

## Dimensions
78.52,-78.74 to 78.74,1574.8 on Mechanical 1
0,0 to 3070.87,0 on Mechanical 1